# Altium PCB PCB_board.PcbDoc (part 1 of 2)
Units mm, origin at the board's own origin, x right, y up, seen from the top; angles counter-clockwise.
Board outline 103.73 x 65.51 mm, 2 copper layers (Top Layer, Bottom Layer); 75 components, 72 nets, 367 pads, 85 vias.
Unrouted connection lines stored in the file: 3.
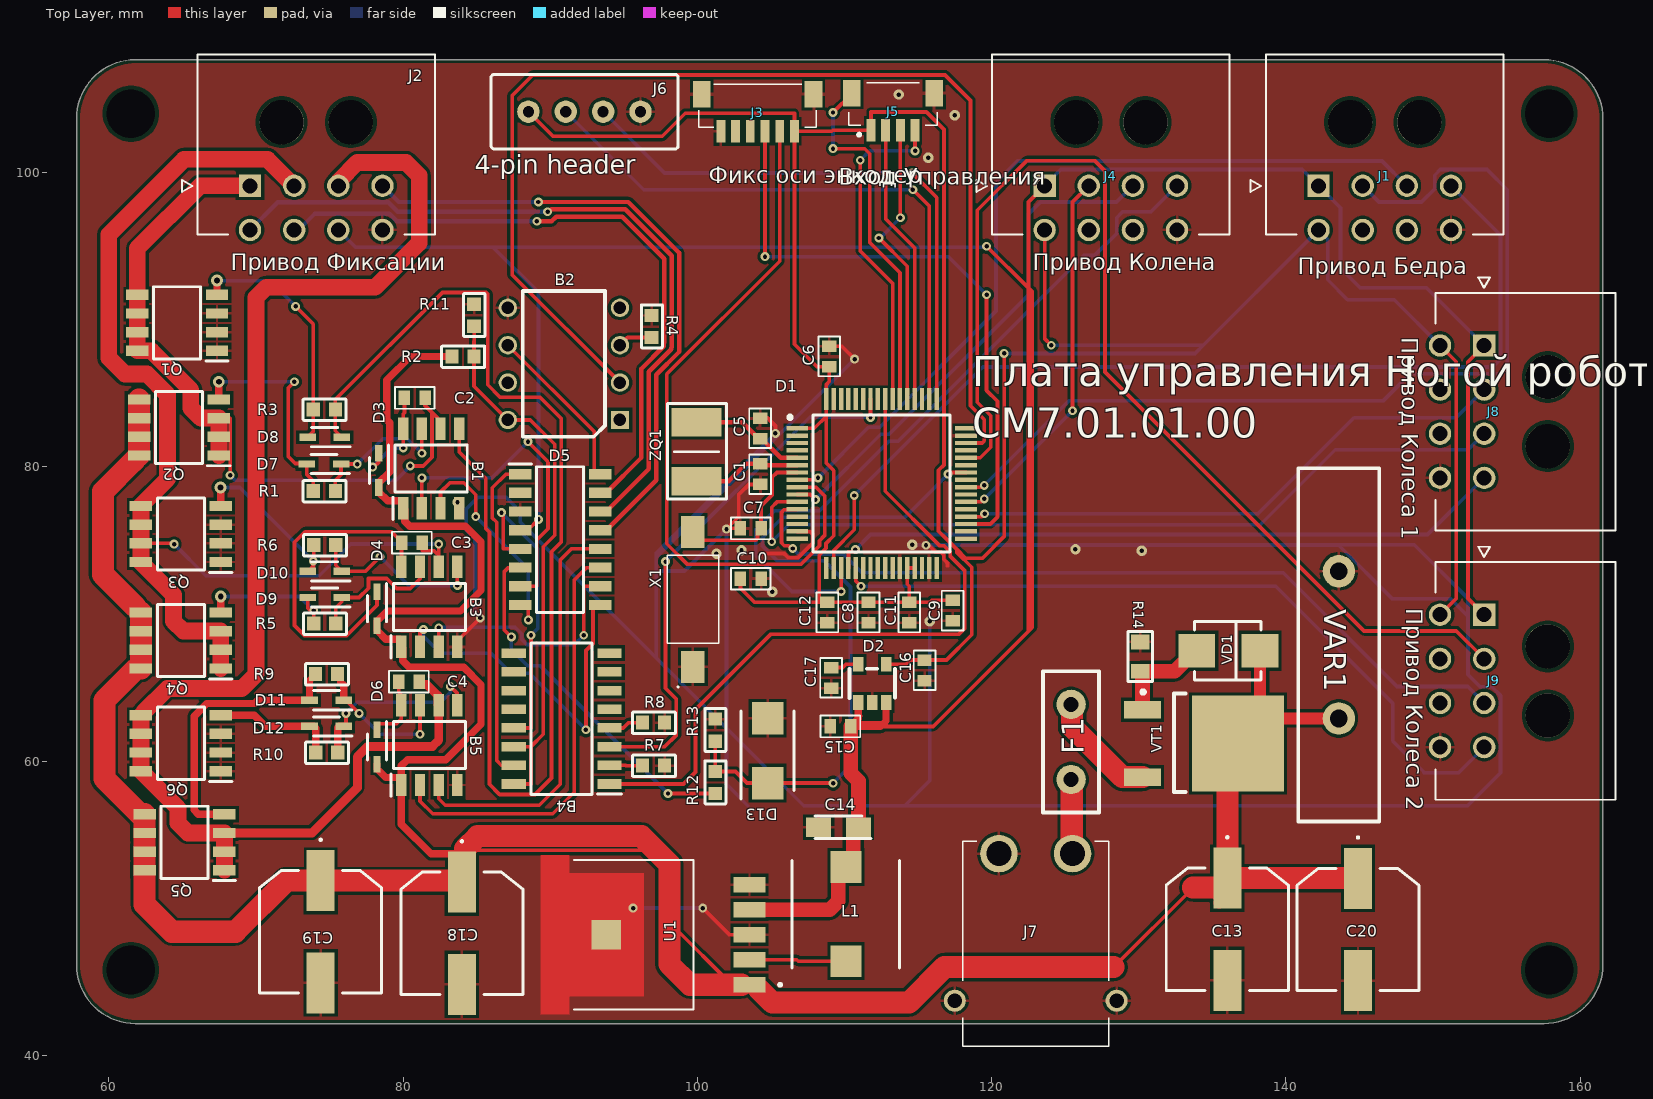
[diagram p0: Top Layer view]
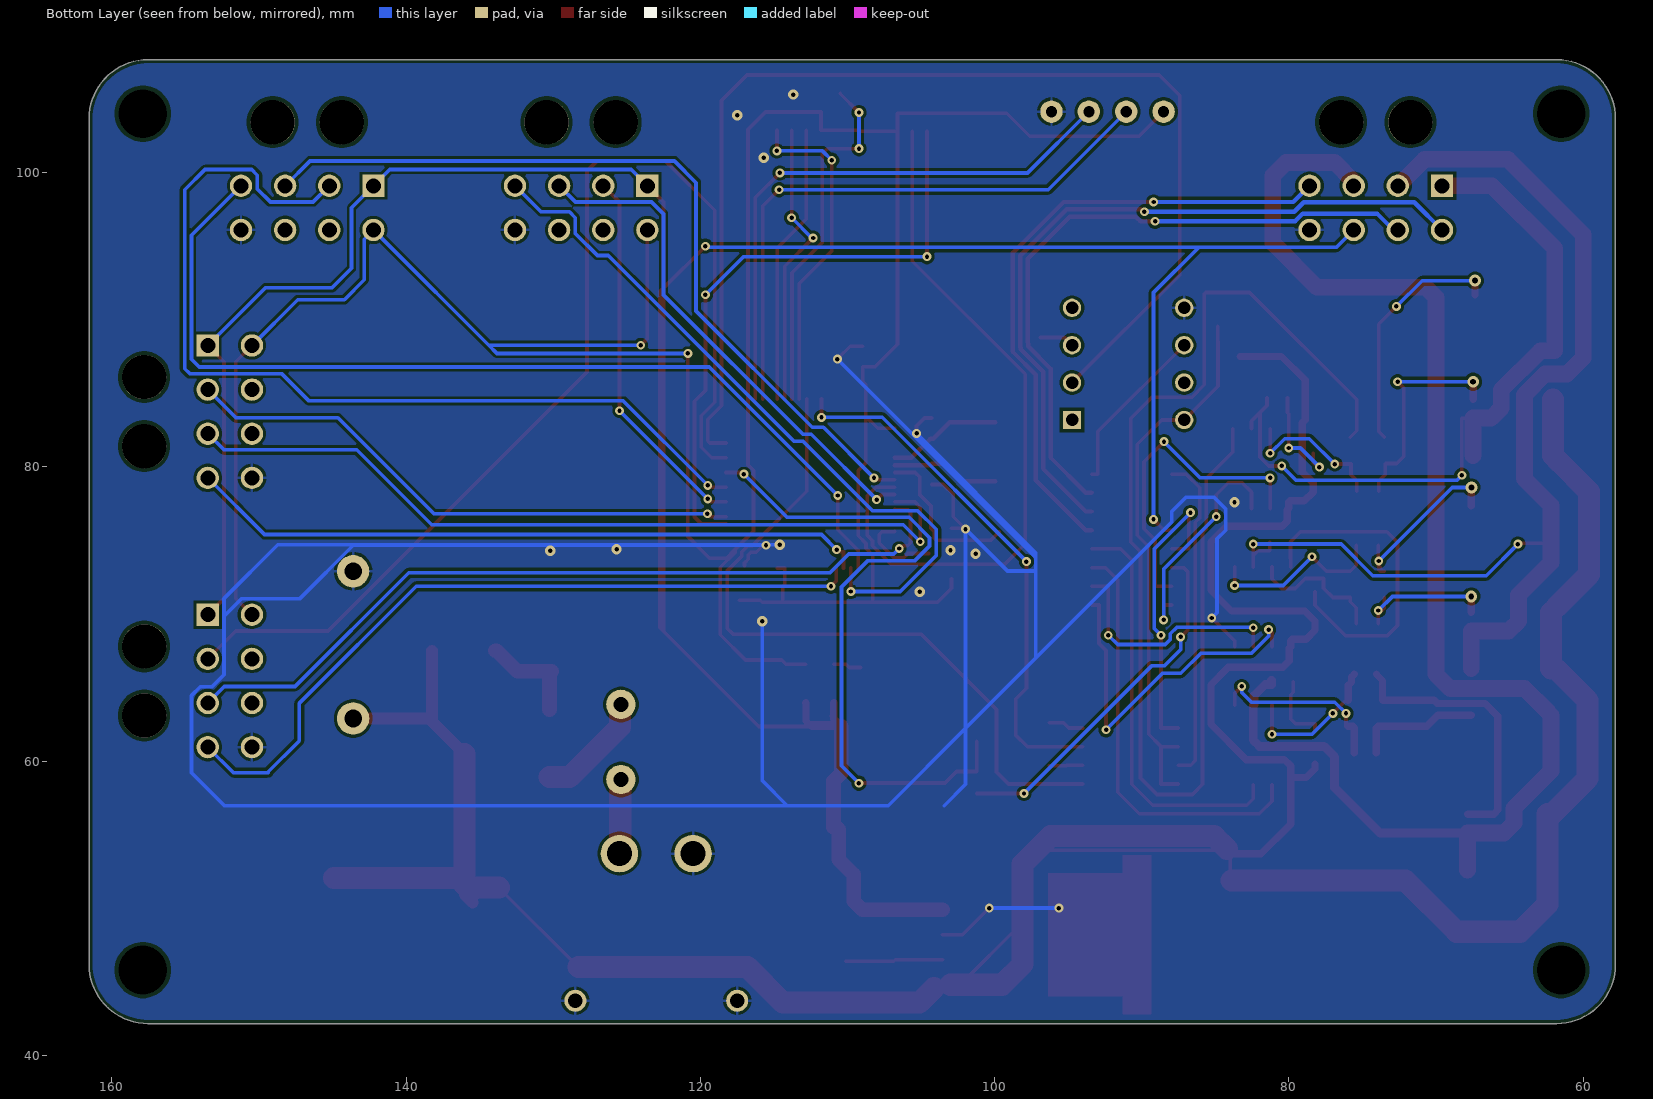
[diagram p1: Bottom Layer view, seen from below]
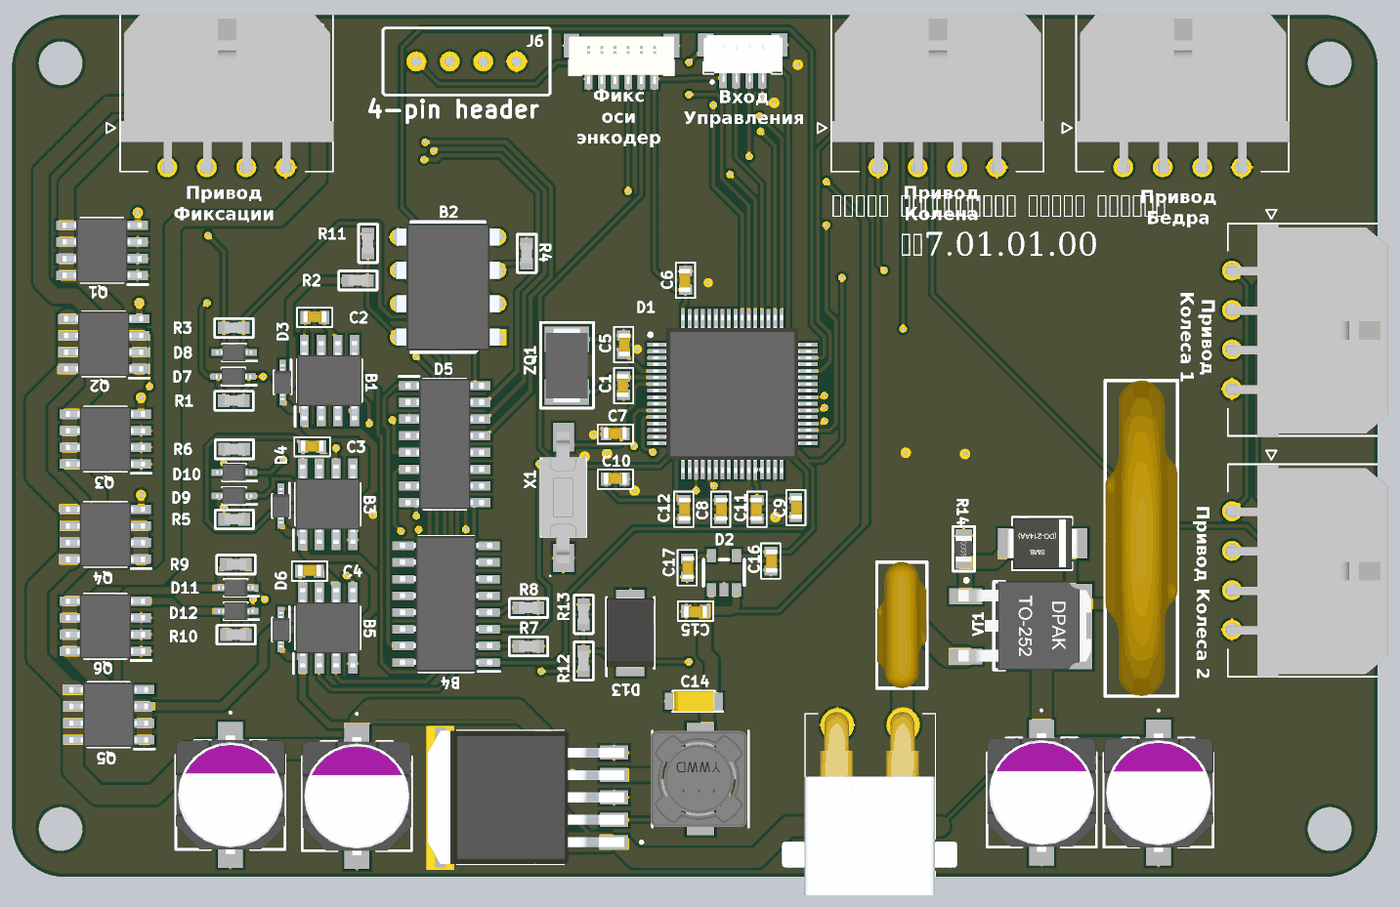
[diagram p2: 3D render of the assembled board from above, using the file's embedded part models]

## Layer stack, top to bottom
Top Solder: solder mask 0.0102, Solder Resist, Dk 3.5
Top Layer: signal copper 0.0356
Dielectric 1: dielectric 0.32, FR-4, Dk 4.8
Bottom Layer: signal copper 0.0356
Bottom Solder: solder mask 0.0102, Solder Resist, Dk 3.5

## Board outline
57.81,46.164 57.81,103.671 cw(c61.81,103.671) 61.81,107.671 157.544,107.671 cw(c157.544,103.671) 161.544,103.671 161.544,46.164 cw(c157.544,46.164) 157.544,42.164 61.81,42.164 cw(c61.81,46.164)

## Design rules (kind name [scope] priority, off if disabled: settings)
AcuteAngle [All] p1: minimum=3.50000000000000E+0001 checktracksonly=FALSE
BoardOutlineClearance "BoardOutlineClearance 1" [All] p1: gap=0.25 ignorepadtopadclearanceinfootprint=FALSE except(0: Arc-SplitContinuation Track-SplitContinuation SMDPad-SplitContinuation THPad-SplitContinuation Via-SplitContinuation Fill-SplitContinuation Poly-SplitContinuation Region-SplitContinuation Text-SplitContinuation) // Milling
BoardOutlineClearance "BoardOutlineClearance 2" [All] p2: gap=0.4 ignorepadtopadclearanceinfootprint=FALSE except(0: Arc-SplitContinuation Track-SplitContinuation SMDPad-SplitContinuation THPad-SplitContinuation Via-SplitContinuation Fill-SplitContinuation Poly-SplitContinuation Region-SplitContinuation Text-SplitContinuation) // V-Cut
Clearance "Clearance-1 1 Oz" [All] p1: gap=0.2 ignorepadtopadclearanceinfootprint=FALSE except(0.25: Arc-Hole Track-Hole SMDPad-Hole THPad-Hole Via-Hole Fill-Hole Poly-Hole Region-Hole Text-Hole) // Standart
Clearance "Clearance 3 Oz" [All] p2: gap=0.35 ignorepadtopadclearanceinfootprint=FALSE except(0.25: Arc-Hole Track-Hole SMDPad-Hole THPad-Hole Via-Hole Fill-Hole Poly-Hole Region-Hole Text-Hole)
Clearance "Clearance 2 Oz" [All] p3: gap=0.3 ignorepadtopadclearanceinfootprint=FALSE except(0.25: Arc-Hole Track-Hole SMDPad-Hole THPad-Hole Via-Hole Fill-Hole Poly-Hole Region-Hole Text-Hole)
Clearance "Clearance-2 1 Oz" [All] p4: gap=0.15 ignorepadtopadclearanceinfootprint=FALSE except(0.2: Arc-Fill Arc-Poly Track-Fill Track-Poly SMDPad-Fill SMDPad-Poly THPad-Fill THPad-Poly Via-Fill Via-Poly Fill-Fill Fill-Poly Poly-Poly; 0.25: Arc-Hole Track-Hole SMDPad-Hole THPad-Hole Via-Hole Fill-Hole Poly-Hole Region-Hole Text-Hole) // Advance
Clearance "Clearance-1 1/2 Oz" [All] p5: gap=0.125 ignorepadtopadclearanceinfootprint=FALSE except(0.2: Arc-Fill Arc-Poly Track-Fill Track-Poly SMDPad-SMDPad SMDPad-Fill SMDPad-Poly THPad-Fill THPad-Poly Via-Fill Via-Poly Fill-Fill Fill-Poly Poly-Poly Poly-Region Poly-Text; 0.25: Arc-Hole Track-Hole SMDPad-Hole THPad-Hole Via-Hole Fill-Hole Poly-Hole Region-Hole Text-Hole) // Standart
Clearance "Clearance-2 1/2 Oz" [All] p6: gap=0.1 ignorepadtopadclearanceinfootprint=FALSE except(0.15: Arc-Fill Arc-Poly Track-Fill Track-Poly SMDPad-SMDPad SMDPad-Fill SMDPad-Poly THPad-Fill THPad-Poly Via-Fill Via-Poly Fill-Fill Fill-Poly Poly-Poly Poly-Region Poly-Text; 0.25: Arc-Hole Track-Hole SMDPad-Hole THPad-Hole Via-Hole Fill-Hole Poly-Hole Region-Hole Text-Hole) // Advance
DiffPairsRouting "DiffPairsRouting 1 Oz" [All] p1: maxlimit=0.254 minlimit=0.2 mostfreqgap=0.254 toplayer_minwidth=0.2 toplayer_maxwidth=0.381 toplayer_prefwidth=0.381 bottomlayer_minwidth=0.2 bottomlayer_maxwidth=0.381 bottomlayer_prefwidth=0.381 maxuncoupledlength=12.7
DiffPairsRouting "DiffPairsRouting 1/2 Oz" [All] p2: maxlimit=0.254 minlimit=0.1 mostfreqgap=0.254 toplayer_minwidth=0.1 toplayer_maxwidth=0.381 toplayer_prefwidth=0.381 bottomlayer_minwidth=0.1 bottomlayer_maxwidth=0.381 bottomlayer_prefwidth=0.381 maxuncoupledlength=12.7
HoleSize "Minimum HoleSize VIA 1" [IsVia] p1: absolutevalues=TRUE maxlimit=5.9 minlimit=0.3 maxpercent=80.000 minpercent=20.000 // Standart
HoleSize "Minimum HoleSize" [IsPad] p2: absolutevalues=TRUE maxlimit=5.9 minlimit=0.6 maxpercent=80.000 minpercent=20.000
HoleSize "Minimum HoleSize VIA 2" [IsVia] p3: absolutevalues=TRUE maxlimit=5.9 minlimit=0.2 maxpercent=80.000 minpercent=20.000 // Advance
HoleToHoleClearance Hole2HoleClearance [All] p1: gap=0.25 allowstackedmicrovias=FALSE
MinimumAnnularRing "Minimum AR VIA Standart" [IsVia] p1: minimumring=0.15
MinimumAnnularRing "Minimum AR PAD Standart" [IsPAD] p2: minimumring=0.2
MinimumAnnularRing "Minimum AR VIA Advance" [IsVia] p3: minimumring=0.1
MinimumAnnularRing "Minimum AR PAD Advance" [IsPAD] p4: minimumring=0.15
MinimumSolderMaskSliver "SolderMask Bridge Standart" [All] p1: minsoldermaskwidth=0.15 // All Masks
MinimumSolderMaskSliver "SolderMask Bridge Advance" [All] p2: minsoldermaskwidth=0.1 // Mask LDI
PlaneClearance "PlaneClearance 1 Oz" [All] p1: clearance=0.2
PlaneClearance "PlaneClearance 3 Oz" [All] p2: clearance=0.35
PlaneClearance "PlaneClearance 2 Oz" [All] p3: clearance=0.3
PlaneClearance "PlaneClearance-1 1/2 Oz" [All] p4: clearance=0.2 // Standart
PlaneClearance "PlaneClearance-2 1/2 Oz" [All] p5: clearance=0.15 // Advance
PlaneConnect "TermalConnect-1 1 Oz" [All] p1: planeconnectstyle=Relief reliefexpansion=0.2 reliefentries=4 reliefconductorwidth=0.2 reliefairgap=0.2 // Standart
PlaneConnect "TermalConnect 3 Oz" [All] p2: planeconnectstyle=Relief reliefexpansion=0.2 reliefentries=4 reliefconductorwidth=0.35 reliefairgap=0.35 // Standart
PlaneConnect "TermalConnect 2 Oz" [All] p3: planeconnectstyle=Relief reliefexpansion=0.2 reliefentries=4 reliefconductorwidth=0.3 reliefairgap=0.3 // Standart
PlaneConnect "TermalConnect-2 1 Oz" [All] p4: pad.planeconnectstyle=Relief pad.reliefexpansion=0.15 pad.reliefentries=4 pad.reliefconductorwidth=0.2 pad.reliefairgap=0.2 via.planeconnectstyle=Direct via.reliefexpansion=0.15 via.reliefentries=4 via.reliefconductorwidth=0.15 via.reliefairgap=0.15 // Advance
PlaneConnect "TermalConnect-1 1/2 Oz" [All] p5: planeconnectstyle=Relief reliefexpansion=0.2 reliefentries=4 reliefconductorwidth=0.2 reliefairgap=0.2 // Standart
PlaneConnect "TermalConnect-2 1/2 Oz" [All] p6: pad.planeconnectstyle=Relief pad.reliefexpansion=0.15 pad.reliefentries=4 pad.reliefconductorwidth=0.15 pad.reliefairgap=0.15 via.planeconnectstyle=Direct via.reliefexpansion=0.15 via.reliefentries=4 via.reliefconductorwidth=0.15 via.reliefairgap=0.15 // Advance
PolygonConnect "PolygonConnect-1 1 Oz" [All] p1: thpad.connectstyle=Relief thpad.reliefconductorwidth=0.2 thpad.reliefentries=4 thpad.polygonreliefangle="90 Angle" thpad.airgapwidth=0.2 smdpad.connectstyle=Relief smdpad.reliefconductorwidth=0.2 smdpad.reliefentries=4 smdpad.polygonreliefangle="90 Angle" smdpad.airgapwidth=0.2 via.connectstyle=Direct via.reliefconductorwidth=0.254 via.reliefentries=4 via.polygonreliefangle="90 Angle" via.airgapwidth=0.254 // Standart
PolygonConnect "PolygonConnect 3 Oz" [All] p2: thpad.connectstyle=Relief thpad.reliefconductorwidth=0.35 thpad.reliefentries=4 thpad.polygonreliefangle="90 Angle" thpad.airgapwidth=0.35 smdpad.connectstyle=Relief smdpad.reliefconductorwidth=0.35 smdpad.reliefentries=4 smdpad.polygonreliefangle="90 Angle" smdpad.airgapwidth=0.35 via.connectstyle=Direct via.reliefconductorwidth=0.254 via.reliefentries=4 via.polygonreliefangle="90 Angle" via.airgapwidth=0.254
PolygonConnect "PolygonConnect 2 Oz" [All] p3: thpad.connectstyle=Relief thpad.reliefconductorwidth=0.3 thpad.reliefentries=4 thpad.polygonreliefangle="90 Angle" thpad.airgapwidth=0.3 smdpad.connectstyle=Relief smdpad.reliefconductorwidth=0.3 smdpad.reliefentries=4 smdpad.polygonreliefangle="90 Angle" smdpad.airgapwidth=0.3 via.connectstyle=Direct via.reliefconductorwidth=0.254 via.reliefentries=4 via.polygonreliefangle="90 Angle" via.airgapwidth=0.254
PolygonConnect "PolygonConnect-2 1 Oz" [All] p4: thpad.connectstyle=Relief thpad.reliefconductorwidth=0.15 thpad.reliefentries=4 thpad.polygonreliefangle="90 Angle" thpad.airgapwidth=0.15 smdpad.connectstyle=Relief smdpad.reliefconductorwidth=0.15 smdpad.reliefentries=4 smdpad.polygonreliefangle="90 Angle" smdpad.airgapwidth=0.15 via.connectstyle=Direct via.reliefconductorwidth=0.254 via.reliefentries=4 via.polygonreliefangle="90 Angle" via.airgapwidth=0.254 // Advance
PolygonConnect "PolygonConnect-1 1/2 Oz" [All] p5: thpad.connectstyle=Relief thpad.reliefconductorwidth=0.15 thpad.reliefentries=4 thpad.polygonreliefangle="90 Angle" thpad.airgapwidth=0.2 smdpad.connectstyle=Relief smdpad.reliefconductorwidth=0.2 smdpad.reliefentries=4 smdpad.polygonreliefangle="90 Angle" smdpad.airgapwidth=0.2 via.connectstyle=Direct via.reliefconductorwidth=0.254 via.reliefentries=4 via.polygonreliefangle="90 Angle" via.airgapwidth=0.254 // Standart
PolygonConnect "PolygonConnect-2 1/2 Oz" [All] p6: thpad.connectstyle=Relief thpad.reliefconductorwidth=0.125 thpad.reliefentries=4 thpad.polygonreliefangle="90 Angle" thpad.airgapwidth=0.15 smdpad.connectstyle=Relief smdpad.reliefconductorwidth=0.125 smdpad.reliefentries=4 smdpad.polygonreliefangle="90 Angle" smdpad.airgapwidth=0.15 via.connectstyle=Direct via.reliefconductorwidth=0.254 via.reliefentries=4 via.polygonreliefangle="90 Angle" via.airgapwidth=0.254 // Advance
RoutingCorners [All] p1 off: cornerstyle=45-Degree minsetback=2.54 maxsetback=2.54
RoutingVias [All] p1: holewidth=0.3 width=0.6 viastyle="Through Hole" minholewidth=0.2 minwidth=0.4 maxholewidth=5.9 maxwidth=6.4
SilkToSilkClearance Silk2SilkClearance [All] p1 off: silktosilkclearance=0.15
SilkToSolderMaskClearance Silk2SolderMaskClearance [IsPad] p1 off: minsilkscreentomaskgap=0.15 clearancetoexposedcopper=TRUE
SolderMaskExpansion SolderMaskExpansion-1 [All] p1: expansion=0.05 istentingtop=FALSE // Standart
SolderMaskExpansion "SolderMaskExpansion LDI" [All] p2: expansion=0.025 istentingtop=FALSE // Advance
SupplyNets "Schematic Supply Nets_4" [InNet('+5V')] p1: voltage=0.000
SupplyNets "Schematic Supply Nets_3" [InNet('GND')] p2: voltage=0.000
SupplyNets "Schematic Supply Nets_2" [InNet('+12V')] p3: voltage=0.000
SupplyNets "Schematic Supply Nets_1" [InNet('+12V_IN')] p4: voltage=0.000
SupplyNets "Schematic Supply Nets" [InNet('+3.3V')] p5: voltage=0.000
UnRoutedNet [All] p1: checkbadconnections=TRUE
Width "Width 1 Oz" [All] p1: maxlimit=10 minlimit=0.15 preferedwidth=0.25 minimp=50.000000 maximp=50.000000 favimp=50.000000 checkconnectedcopper=TRUE
Width "Width 3 Oz" [All] p2: maxlimit=10 minlimit=0.35 preferedwidth=0.4 checkconnectedcopper=TRUE
Width "Width 2 Oz" [All] p3: maxlimit=10 minlimit=0.3 preferedwidth=0.35 minimp=50.000000 maximp=50.000000 favimp=50.000000 checkconnectedcopper=TRUE
Width "Width 1/2 Oz" [All] p4: maxlimit=10 minlimit=0.1 preferedwidth=0.125 checkconnectedcopper=TRUE
20 further rules are at their usual default settings.

## Classes and differential pairs
component class A1: B1 B2 B3 B4 B5 C2 C3 C4 D3 D4 D5 D6 D7 D8 D9 D10 D11 D12 D13 Q1 Q2 Q3 Q4 Q5 Q6 R1 R2 R3 R4 R5 R6 R7 R8 R9 R10 R11 R12 R13
component class Схема_принципиальная_общая: C1 C5 C6 C7 C8 C9 C10 C11 C12 C13 C14 C15 C16 C17 C18 C19 C20 D1 D2 F1 J1 J2 J3 J4 J5 J6 J7 J8 J9 L1 R14 U1 VAR1 VD1 VT1 X1 ZQ1

## Components (designator, comment, footprint, x,y, rotation, side; value= is the part's Value field where it differs from the comment)
B1 "IR2101S" SOIC127P600X175-8N 81.915,79.883 r90 top
B2 "HCPL-4504-000E" DIP762W65P254L965H470Q8N 90.932,86.995 r180 top
B3 "IR2101S" SOIC127P600X175-8N 81.788,70.485 r90 top
B4 "TLP291-4_GB_E_T" SOIC127P700X220-16N 90.781,62.89 r180 top
B5 "IR2101S" SOIC127P600X175-8N 81.788,61.087 r90 top
C1 "12пФ" CAPC1608X87N 104.267,79.502 r270 top
C2 "105пФ" CAPC1608X87N 80.797,84.684 r180 top
C3 "105пФ" CAPC1608X87N 80.605,74.854 r180 top
C4 "105пФ" CAPC1608X87N 80.4,65.4 r180 top
C5 "12пФ" CAPC1608X87N 104.267,82.615 r90 top
C6 "100нФ" CAPC1608X87N 108.966,87.503 r270 top
C7 "0.1мкФ" CAPC1608X87N 103.632,75.819 r180 top
C8 "100нФ" CAPC1608X87N 111.633,70.104 r90 top
C9 "100нФ" CAPC1608X87N 117.348,70.231 r90 top
C10 "100нФ" CAPC1608X87N 103.632,72.39 r180 top
C11 "10нФ" CAPC1608X87N 114.402,70.104 r270 top
C12 "100нФ" CAPC1608X87N 108.839,70.104 r90 top
C13 "270мкФ" 16SVF270M 136.019,48.57 r270 top
C14 "220мкФ" CAPPM3216X180N 109.6,55.5 r180 top
C15 "1мкФ" CAPC1608X87N 109.728,62.357 r0 top
C16 "1мкФ" CAPC1608X87N 115.443,66.167 r90 top
C17 "22нФ" CAPC1608X87N 109.093,65.659 r90 top
C18 "270мкФ" 16SVF270M 84,48.3 r270 top
C19 "270мкФ" 16SVF270M 74.4,48.4 r270 top
C20 "270мкФ" 16SVF270M 144.902,48.559 r270 top
D1 "" QFP50P1200X1200X160-64N 112.522,78.867 r0 top
D2 "" RT9193 111.887,65.278 r0 top
D3 "IN4148WS" SOD2713X115N 78.359,79.756 r270 top
D4 "IN4148WS" SOD2713X115N 78.232,70.358 r270 top
D5 "JY01-SOP16" SOIC127P600X175-16N 90.678,75.057 r0 top
D6 "IN4148WS" SOD2713X115N 78.232,60.96 r270 top
D7 "IN4148WS" SOD2713X115N 74.625,80.188 r180 top
D8 "IN4148WS" SOD2713X115N 74.676,82.017 r180 top
D9 "IN4148WS" SOD2713X115N 74.676,71.12 r180 top
D10 "IN4148WS" SOD2713X115N 74.676,72.898 r180 top
D11 "IN4148WS" SOD2713X115N 74.803,64.135 r180 top
D12 "IN4148WS" SOD2713X115N 74.803,62.357 r180 top
D13 "SMBJ3V3-E3_52" DIOM5436X244N 104.775,60.706 r90 top
F1 "Fuze_LB250LVF" Fuze_LB250LVF 125.4,61.3 r90 top
J1 "430450800" MOLEX_430450800 142.223,99.1 r180 top
J2 "430450800" MOLEX_430450800 69.6,99.1 r180 top
J3 "BM06B-SRSS-TB_LF__SN_" BM06BSRSSTBLFSN 104.1,104.4 r180 top
J4 "430450800" MOLEX_430450800 123.604,99.1 r180 top
J5 "BM04B-SRSS-TB_LFSN_" BM04BSRSSTBLFSN 113.3,104.2 r0 top
J6 "4-pin header" "4-pin header" 93.599,104.14 r0 top
J7 "XT30PW-M" XT30PWM 123,47.8 r180 top
J8 "430450800" MOLEX_430450800 153.48,88.25 r90 top
J9 "430450800" MOLEX_430450800 153.48,69.95 r90 top
L1 "33мкГн" INDPM7373X450N 110.1,49.6 r90 top
Q1 "IRF8736PBF" SOIC127P600X175-8N 64.643,89.789 r180 top
Q2 "IRF8736PBF" SOIC127P600X175-8N 64.77,82.677 r180 top
Q3 "IRF8736PBF" SOIC127P600X175-8N 64.897,75.438 r180 top
Q4 "IRF8736PBF" SOIC127P600X175-8N 64.897,68.199 r180 top
Q5 "IRF8736PBF" SOIC127P600X175-8N 65.151,54.483 r180 top
Q6 "IRF8736PBF" SOIC127P600X175-8N 64.897,61.214 r180 top
R1 "51" RESC1608X55N 74.651,78.359 r180 top
R2 "51кОм" RESC1608X55N 84.074,87.503 r180 top
R3 "51" RESC1608X55N 74.651,83.896 r180 top
R4 "130" RESC1608X55N 96.901,89.535 r270 top
R5 "51" RESC1608X55N 74.676,69.342 r180 top
R6 "51" RESC1608X55N 74.676,74.676 r180 top
R7 "66" RESC1608X55N 97.028,59.69 r180 top
R8 "66" RESC1608X55N 97.028,62.611 r180 top
R9 "51" RESC1608X55N 74.803,65.913 r180 top
R10 "51" RESC1608X55N 74.815,60.579 r180 top
R11 "36кОм" RESC1608X55N 84.836,90.297 r270 top
R12 "10кОм" RESC1608X55N 101.219,58.547 r270 top
R13 "5.1кОм" RESC1608X55N 101.219,62.103 r270 top
R14 "Resistor 0805 100 Ohm" "RES: 0805" 130.1,67.1 r270 top value=100
U1 "LM2575HVSX-5.0_NOPB" VREG_LM2575HVSX-5.0_NOPB 97,48.2 r180 top
VAR1 "FPV160808G120PLT" Varistor_20K391 143.6,67.9 r270 top
VD1 "Zener diode, 5.1V, 500mW, 0.9V, 17Ohm, SOD-123, -55...+150°C" "DIODE: SMB" 136.1,67.5 r0 top
VT1 "MOSFET P-channel transistor, 20V, 2.6A, 2.9nC, 2.5W, 135mOhm, 220pF, SOT-23, -55...+150°C" DPAK 133.5,61.2 r0 top
X1 "1437566-3" 14375663 99.695,70.993 r90 top
ZQ1 "NX5032GA-12.000M-LN-CD-1" INDC5032X150N 99.949,81.026 r90 top

## Footprints (in the part's own frame and the unit in brackets; to place one, negate y for a bottom-side part, rotate by r counter-clockwise, add the part's x,y. Pads: shape width x height; smd on the part's side, far side on the other; paste and mask are expansions set on the pad)
"4-pin header" [mil]
  round 60 hole 30: 1(-200,0) 2(-100,0) 3(0,0) 4(100,0)
  silkscreen extent -300,-100 200,100
16SVF270M [mm]
  rect 4.15x1.9 smd: 1(-3.475,0) 2(3.475,0)
  silkscreen extent -6.3,-4.15 4.15,4.15, body extent -4.5,-4.15 4.5,4.15, height 6.9
14375663 [mm]
  rect 2.18x1.6 smd: 1(-4.59,0) 2(4.59,0)
  silkscreen extent -6,-1.75 3,1.75, body extent -4.98,-1.72 4.98,1.78, height 4.32
BM04BSRSSTBLFSN [mm]
  rect 0.6x1.55 smd: 1(-1.5,-1.325) 2(-0.5,-1.325) 3(0.5,-1.325) 4(1.5,-1.325)
  rect 1.2x1.8 smd: MP1(-2.8,1.2) MP2(2.8,1.2)
  silkscreen extent -3,-1.72 3,1.9, body extent -2.95,-1.65 3.05,1.95, height 4.41
BM06BSRSSTBLFSN [mm]
  rect 0.6x1.55 smd: 1(-2.5,1.588) 2(-1.5,1.588) 3(-0.5,1.588) 4(0.5,1.588) 5(1.5,1.588) 6(2.5,1.588)
  rect 1.2x1.8 smd: 7(-3.8,-0.937) 8(3.8,-0.937)
  silkscreen extent -4,-1.59 4,1.31, body extent -4.01,-1.62 3.99,1.98, height 4.3
CAPC1608X87N [mm]
  rect 0.78x0.98 smd: 1(-0.7,0) 2(0.7,0)
  silkscreen extent -1.35,-0.74 1.35,0.74, body extent -0.87,-0.49 0.87,0.38, height 0.97
CAPPM3216X180N [mm]
  rect 1.7x1.3 smd: 1(-1.35,0) 2(1.35,0)
  silkscreen extent -2.2,-0.78 1.6,0.77, body extent -1.6,-0.79 1.6,0.76, height 1.8
"DIODE: SMB" [mm]
  rect 2.5x2.3 smd: 1(-2.15,0) 2(2.15,0)
  silkscreen extent -2.3,-2 2.2,2, body extent -2.75,-1.95 2.75,1.95, height 2.45
DIOM5436X244N [mm]
  rect 2.2x2.15 smd: 1(-2.2,0) 2(2.2,0)
  silkscreen extent -3.27,-1.81 2.7,1.81, body extent -2.7,-1.81 2.7,1.81, height 2.44
DIP762W65P254L965H470Q8N [mm]
  rect 1.25x1.25 / inner round 1.25 / far side rect 1.25x1.25 hole 0.85: 1(-3.81,3.81)
  round 1.25 hole 0.85: 2(-3.81,1.27) 3(-3.81,-1.27) 4(-3.81,-3.81) 5(3.81,-3.81) 6(3.81,-1.27) 7(3.81,1.27) 8(3.81,3.81)
  silkscreen extent -2.79,-4.95 2.79,4.95, body extent -3.97,-4.82 3.97,4.82, height 4.7
DPAK [mm]
  rect 2.5x1.2 smd: 1(-3.25,2.29) 3(-3.25,-2.29)
  rect 6.25x6.5 smd: 2(3.25,0)
  round 0.5 on Mech1: ""(-3.2,2.9)
  silkscreen extent -3.32,-3.3 -0.3,3.62, body extent -3.8,-3.32 6.3,3.42, height 2.37
Fuze_LB250LVF [mm]
  round 2 hole 1: 1(-2.55,0) 2(2.55,0)
  silkscreen extent -4.8,-1.9 4.8,1.9, body extent -4.8,-1.9 4.8,1.9, height 19.69
INDC5032X150N [mm]
  rect 1.95x3.4 smd: 1(-2,0) 2(2,0)
  silkscreen extent -3.23,-2.03 3.28,1.98, body extent -2.8,-1.6 2.8,1.6, height 1.6
INDPM7373X450N [mm]
  rect 2.15x2.1 smd: 1(-3.2,0) 2(3.2,0)
  silkscreen extent -3.65,-3.65 3.65,3.65, body extent -3.65,-3.52 3.65,3.78, height 4.14
MOLEX_430450800 [mm]
  rect 1.52x1.52 / inner round 1.52 / far side rect 1.52x1.52 hole 1.02 mask+0.076: 1(0,0)
  round 1.52 hole 1.02 mask+0.076: 2(-3,0) 3(-6,0) 4(-9,0) 5(0,3) 6(-3,3) 7(-6,3) 8(-9,3)
  round 3 hole 3 unplated mask+0.076: ""(-6.85,-4.32) ""(-2.15,-4.32)
  silkscreen extent -12.58,-8.92 4.62,3.32, body extent -12.62,-8.84 3.53,3.4, height 8.92
QFP50P1200X1200X160-64N [mm]
  rect 1.475x0.3 smd: 1(-5.738,3.75) 2(-5.738,3.25) 3(-5.738,2.75) 4(-5.738,2.25) 5(-5.738,1.75) 6(-5.738,1.25) 7(-5.738,0.75) 8(-5.738,0.25) 9(-5.738,-0.25) 10(-5.738,-0.75) 11(-5.738,-1.25) 12(-5.738,-1.75) 13(-5.738,-2.25) 14(-5.738,-2.75) 15(-5.738,-3.25) 16(-5.738,-3.75) 33(5.738,-3.75) 34(5.738,-3.25) 35(5.738,-2.75) 36(5.738,-2.25) 37(5.738,-1.75) 38(5.738,-1.25) 39(5.738,-0.75) 40(5.738,-0.25) 41(5.738,0.25) 42(5.738,0.75) 43(5.738,1.25) 44(5.738,1.75) 45(5.738,2.25) 46(5.738,2.75) 47(5.738,3.25) 48(5.738,3.75)
  rect 0.3x1.475 smd: 17(-3.75,-5.738) 18(-3.25,-5.738) 19(-2.75,-5.738) 20(-2.25,-5.738) 21(-1.75,-5.738) 22(-1.25,-5.738) 23(-0.75,-5.738) 24(-0.25,-5.738) 25(0.25,-5.738) 26(0.75,-5.738) 27(1.25,-5.738) 28(1.75,-5.738) 29(2.25,-5.738) 30(2.75,-5.738) 31(3.25,-5.738) 32(3.75,-5.738) 49(3.75,5.738) 50(3.25,5.738) 51(2.75,5.738) 52(2.25,5.738) 53(1.75,5.738) 54(1.25,5.738) 55(0.75,5.738) 56(0.25,5.738) 57(-0.25,5.738) 58(-0.75,5.738) 59(-1.25,5.738) 60(-1.75,5.738) 61(-2.25,5.738) 62(-2.75,5.738) 63(-3.25,5.738) 64(-3.75,5.738)
  silkscreen extent -6.35,-4.65 4.65,4.65, body extent -6,-6 6,6, height 1.6
"RES: 0805" [mm]
  rect 1x1.25 smd: 1(-1,0) 2(1,0)
  silkscreen extent -1.7,-0.83 1.7,0.83, body extent -1,-0.6 1,0.6, height 0.44
RESC1608X55N [mm]
  rect 0.9x0.95 smd: 1(-0.75,0) 2(0.75,0)
  silkscreen extent -1.47,-0.71 1.45,0.74, body extent -0.8,-0.4 0.75,0.4, height 0.45
RT9193 [mm]
  rect 0.7x1 smd: 1(-0.95,-1.3) 2(0,-1.3) 3(0.95,-1.3) 4(0.95,1.3) 5(-0.95,1.3)
  silkscreen extent -1.55,-1 1.55,1
SOD2713X115N [mm]
  rect 1.125x0.5 smd: 1(-1.162,0) 2(1.162,0)
  silkscreen extent -1.73,-0.65 0.89,0.65, body extent -1.34,-0.65 1.34,0.65, height 1.15
SOIC127P600X175-8N [mm]
  rect 1.525x0.7 smd: 1(-2.712,1.905) 2(-2.712,0.635) 3(-2.712,-0.635) 4(-2.712,-1.905) 5(2.712,-1.905) 6(2.712,-0.635) 7(2.712,0.635) 8(2.712,1.905)
  silkscreen extent -3.47,-2.45 1.6,2.61, body extent -3,-2.45 3,2.45, height 1.75
SOIC127P600X175-16N [mm]
  rect 1.525x0.7 smd: 1(-2.712,4.445) 2(-2.712,3.175) 3(-2.712,1.905) 4(-2.712,0.635) 5(-2.712,-0.635) 6(-2.712,-1.905) 7(-2.712,-3.175) 8(-2.712,-4.445) 9(2.712,-4.445) 10(2.712,-3.175) 11(2.712,-1.905) 12(2.712,-0.635) 13(2.712,0.635) 14(2.712,1.905) 15(2.712,3.175) 16(2.712,4.445)
  silkscreen extent -3.47,-4.95 1.6,5.15, body extent -3,-4.95 3,4.95, height 1.75
SOIC127P700X220-16N [mm]
  rect 1.65x0.65 smd: 1(-3.25,4.445) 2(-3.25,3.175) 3(-3.25,1.905) 4(-3.25,0.635) 5(-3.25,-0.635) 6(-3.25,-1.905) 7(-3.25,-3.175) 8(-3.25,-4.445) 9(3.25,-4.445) 10(3.25,-3.175) 11(3.25,-1.905) 12(3.25,-0.635) 13(3.25,0.635) 14(3.25,1.905) 15(3.25,3.175) 16(3.25,4.445)
  silkscreen extent -4.07,-5.15 2.08,5.15, body extent -3.5,-5.17 3.5,5.13, height 2.2
Varistor_20K391 [mm]
  round 2.2 hole 1.2: 1(-5,0) 2(5,0)
  silkscreen extent -12,-2.75 12,2.75, body extent -11.99,-2.75 11.99,2.75, height 28.49
VREG_LM2575HVSX-5.0_NOPB [mm]
  rect 2.16x1.07 smd: 1(-6.545,3.4) 2(-6.545,1.7) 3(-6.545,0) 4(-6.545,-1.7) 5(-6.545,-3.4)
  rect 2x2 smd paste-2 mask+0: 6(3.175,0)
  Top Layer region: 7.625,-5.4 5.715,-5.4 5.715,-4.165 0.635,-4.165 0.635,4.165 5.715,4.165 5.715,5.4 7.625,5.4
  silkscreen extent -8.72,-5.08 5.4,5.08, body extent -7.3,-5.08 7.61,5.08, height 4.83
XT30PWM [mm]
  round 2.55 hole 1.7: 1(-2.5,-5.912) 2(2.5,-5.912)
  round 1.5 hole 1: 3(5.5,4.088) 4(-5.5,4.088)
  silkscreen extent -4.95,-6.76 4.95,7.19, body extent -6.6,-6.91 6.7,7.04, height 5.22

## Part data
B1 B3 B5: "IC GATE DRVR HALF-BRIDGE 8SOIC", Manufacturer_Name=Infineon, Datasheet Link=https://pdf1.alldatasheet.com/datasheet-pdf/view/102221/IRF/IR2101S.html, Geometry.Height=1.75mm, Manufacturer_Part_Number=IR2101S
B2: "Optocoupler, Transistor Output, 1 Channel, DIP, 8 Pins, 25 mA, 3.75 kV, 25 %", Manufacturer_Name="Avago Technologies", Mouser Part Number=630-HCPL-4504-000E, Datasheet Link=https://componentsearchengine.com/Datasheets/2/HCPL-4504-000E.pdf, Geometry.Height=4.7mm, Manufacturer_Part_Number=HCPL-4504-000E, Mouser Price/Stock=https://www.mouser.co.uk/ProductDetail/Broadcom-Avago/HCPL-4504-000E?qs=s%252BgfxR24RQ6uFOvNhu%252ByDw%3D%3D
B4: "Photocoupler, Tr, 2.3mm, DC, SO16", Arrow Part Number=TLP291-4(GB,E(T, Manufacturer_Name=Toshiba, Arrow Price/Stock=https://www.arrow.com/en/products/tlp291-4-gbe-t/toshiba?region=europe, Datasheet Link=http://toshiba.semicon-storage.com/info/docget.jsp?did=12858&prodName=TLP291-4, Geometry.Height=2.2mm, Manufacturer_Part_Number=TLP291-4(GB,E(T
C1 C2 C3 C4 C5 C6 C7 C8 C9 C10 C11 C12 C15 C16 C17: library part C0603, "C 0603", Manufacturer_Name=KEMET, Manufacturer_Part_Number=C0603C222K4REC7411, Datasheet Link=https://www.kemet.com/specsheet/C0603C222K4REC7411, Geometry.Height=0.87mm
C13 C18 C19 C20: library part 25SVPF100M, "Capacitor Polarised", Manufacturer_Name=Panasonic, Mouser Part Number=667-25SVPF100M, Arrow Part Number=25SVPF100M, Arrow Price/Stock=https://www.arrow.com/en/products/25svpf100m/panasonic?region=nac, Datasheet Link=http://industrial.panasonic.com/cdbs/www-data/pdf/AAB8000/AAB8000C177.pdf, Height=7mm, Manufacturer_Part_Number=25SVPF100M, Mouser Price/Stock=https://www.mouser.co.uk/ProductDetail/Panasonic/25SVPF100M?qs=OE1iw1LrrPHrTLW3S9d9vQ%3D%3D
C14: library part TAJA104K050R, "Capacitor tantalum TAJ 1206 100nF 50V AVX 100nF SMD Solid MnO2 Tantalum Electrolytic Capacitor, 50 V dc +/-10%, TAJ Series", Manufacturer_Name="Kyocera AVX", Mouser Part Number=N/A, Datasheet Link=http://www.farnell.com/datasheets/1680476.pdf, Geometry.Height=1.8mm, Manufacturer_Part_Number=TAJA104K050R, Mouser Price/Stock=http://www.mouser.com/Search/ProductDetail.aspx?qs=TDs2sH6HKGut6%252bATQXwpTg%3d%3d
D1: library part STM32G474RBT6, "LQFP is a 64 pins, 10 x 10 mm low-profile quad flat package.", Manufacturer_Name=STMicroelectronics, Mouser Part Number=511-STM32G474RBT6, Arrow Part Number=STM32G474RBT6, Arrow Price/Stock=https://www.arrow.com/en/products/stm32g474rbt6/stmicroelectronics?region=nac, Datasheet Link=https://www.mouser.com/datasheet/2/389/stm32g474cb-1600828.pdf, Geometry.Height=1.6mm, Manufacturer_Part_Number=STM32G474RBT6, Mouser Price/Stock=https://www.mouser.co.uk/ProductDetail/STMicroelectronics/STM32G474RBT6?qs=uwxL4vQweFP0uAZUZXLBhQ%3D%3D
D2: library part RT9193
D3 D4 D6 D7 D8 D9 D10 D11 D12: "Small Signal Fast Switching Diode", Manufacturer_Name=Vishay, Datasheet Link=https://docs.rs-online.com/69cb/0900766b80dd2a8d.pdf, Geometry.Height=1.15mm, Manufacturer_Part_Number=IN4148WS
D5: "BLDC FOC Controller", Manufacturer_Name=China, Datasheet Link=http://www.lenzetech.com/public/store/pdf/jsggs/AC6969A%C2%A0Datasheet%C2%A0V1.0.pdf, Geometry.Height=1.75mm, Manufacturer_Part_Number=JY01-SOP16
D13: "TVS Diode (Uni-directional)", Arrow Part Number=SMBJ3V3-E3/52, Manufacturer_Name=Vishay, Mouser Part Number=625-SMBJ3V3-E3, Arrow Price/Stock=https://www.arrow.com/en/products/smbj3v3-e352/vishay?region=nac, Datasheet Link=http://www.farnell.com/datasheets/2244846.pdf, Height=2.44mm, Manufacturer_Part_Number=SMBJ3V3-E3/52, Mouser Price/Stock=https://www.mouser.co.uk/ProductDetail/Vishay-General-Semiconductor/SMBJ3V3-E3-52?qs=%252BKsK5HlK7GG3a%2FL90gCz%2Fg%3D%3D
F1: "https://www.chipdip.ru/product/lb250lvf-wayon-8030578313"
J1 J2 J4 J8 J9: Package=None, Availability=Unavailable, MP=430450800, Price=None
J3: "Wire To Board / Wire To Wire Connector RoHS", Arrow Part Number=BM06B-SRSS-TB(LF)(SN), Manufacturer_Name="JST (JAPAN SOLDERLESS TERMINALS)", Mouser Part Number=N/A, Arrow Price/Stock=https://www.arrow.com/en/products/bm06b-srss-tb-lf-sn/jst-manufacturing?region=europe, Datasheet Link=http://www.jst-mfg.com/product/pdf/eng/eSR.pdf, Geometry.Height=4.25mm, Manufacturer_Part_Number=BM06B-SRSS-TB(LF)(SN), Mouser Price/Stock=https://www.mouser.co.uk/ProductDetail/JST-Commercial/BM06B-SRSS-TBLFSN?qs=IKkN%2F947nfAcbKIXx%2F1kIg%3D%3D
J5: "JST SH, 4 Way, 1 Row, Straight PCB Header", Arrow Part Number=BM04B-SRSS-TB(LFSN), Manufacturer_Name="JST (JAPAN SOLDERLESS TERMINALS)", Arrow Price/Stock=https://www.arrow.com/en/products/bm04b-srss-tb-lf-sn/jst-manufacturing?region=europe, Datasheet Link=http://uk.rs-online.com/web/p/products/5151541P, Geometry.Height=4.25mm, Manufacturer_Part_Number=BM04B-SRSS-TB(LFSN)
J7: "30A Low Temperature Rise Fire Retardant Plug", Manufacturer_Name=Amass, Datasheet Link=https://www.tme.eu/sl/Document/ce4077e36b79046da520ca73227e15de/XT30PW%20SPEC.pdf, Geometry.Height=5mm, Manufacturer_Part_Number=XT30PW-M
L1: library part B82472G6332M000, "SMD / SMT Inductors (Coils), L=3.3uH, 7.3mm x 7.3mm", Manufacturer_Name=TDK, Mouser Part Number=871-B82472G6332M000, Datasheet Link=https://product.tdk.com/system/files/dam/doc/product/inductor/inductor/smd/data_sheet/30/db/ind_2008/b82472g6.pdf, Geometry.Height=4.5mm, Manufacturer_Part_Number=B82472G6332M000, Mouser Price/Stock=https://www.mouser.co.uk/ProductDetail/EPCOS-TDK/B82472G6332M000?qs=x3Z3TaiycdvLmjm0xB%2FIcA%3D%3D
Q1 Q2 Q3 Q4 Q5 Q6: "Infineon IRF8736PBF N-channel MOSFET, 18 A, 30 V HEXFET, 8-Pin SOIC", Manufacturer_Name=Infineon, Mouser Part Number=942-IRF8736PBF, Arrow Part Number=IRF8736PBF, Arrow Price/Stock=https://www.arrow.com/en/products/irf8736pbf/infineon-technologies-ag, Datasheet Link=https://www.infineon.com/dgdl/irf8736pbf.pdf?fileId=5546d462533600a40153560d9e661d7f, Geometry.Height=1.75mm, Manufacturer_Part_Number=IRF8736PBF, Mouser Price/Stock=https://www.mouser.co.uk/ProductDetail/Infineon-IR/IRF8736PBF?qs=Z8%252BeY1k3TII91Qkl2E%252BuQw%3D%3D
R1 R2 R3 R4 R5 R6 R7 R8 R9 R10 R11 R12 R13: library part R0603, "Resistor 0603 Case 150 +/-0.1% 0.063W +/-25ppm/C", Manufacturer_Name="TE Connectivity", Manufacturer_Part_Number=CPF0603B150RE, Datasheet Link=http://www.farnell.com/datasheets/1786775.pdf, Geometry.Height=0.55mm
R14: Manufacturer=Yageo, Package=0805, Power=0.125W, Temperature=-55...+125°C, Tolerance=±5%, TypeResistor="Resistor film", ValueManufacturerPartNumber="Resistor film, 100, ±5%, 0805, 0.125W, -55...+125°C", HelpURL=https://www.digikey.com/product-detail/en/yageo/RC0805JR-07100RL/311-100ARCT-ND/731185
U1: "Buck Switching Regulator IC Positive Fixed 5V 1 Output 1A TO-263-6, D2PAK (5 Leads + Tab), TO-263BA", Package="TO-263-5 Microchip", Check_prices=https://www.snapeda.com/parts/LM2575-5.0WU/Microchip/view-part/?ref=eda, MF=Microchip, MP=LM2575-5.0WU, SnapEDA_Link=https://www.snapeda.com/parts/LM2575-5.0WU/Microchip/view-part/?ref=snap
VAR1: library part "Vristor 20K391"
VD1: library part Zener_single, Current=500mW, Manufacturer="Diodes Incorporated", Package=SOD-123, PartNumber=MMSZ5231B-7-F, Temperature=-55...+150°C, Voltage=5.1V, VoltageDrop=0.9V, HelpURL=https://www.digikey.com/product-detail/en/diodes-incorporated/MMSZ5231B-7-F/MMSZ5231B-FDICT-ND/755506, RecoveryTime=17Ohm, TypeDiode="Zener diode", ValueManufacturerPartNumber="Zener diode, 5.1V, 500mW, 0.9V, 17Ohm, SOD-123, -55...+150°C"
VT1: library part IRFZ44N, CurrentDS=2.6A, InputCapacitor=220pF, Manufacturer="Infineon Technologies", MaxPower=2.5W, Package=SOT-23, Temperature=-55...+150°C, VoltageDS=20V, GateCharge=2.9nC, HelpURL=https://www.digikey.com/product-detail/en/infineon-technologies/IRLML2246TRPBF/IRLML2246TRPBFCT-ND/2639576, PartNumber=IRFZ44N, RDS=135mOhm, TypeTransistor="MOSFET P-channel transistor", ValueManufacturerPartNumber="MOSFET P-channel transistor, 20V, 2.6A, 2.9nC, 2.5W, 135mOhm, 220pF, SOT-23, -55...+150°C"
X1: "1437566-3 - PUSHBUTTON SWITCH, SPST, 0.05A, 24V", Manufacturer_Name="TE Connectivity", Mouser Part Number=N/A, Arrow Part Number=1437566-3, Arrow Price/Stock=https://www.arrow.com/en/products/1437566-3/te-connectivity?region=europe, Datasheet Link=https://www.te.com/commerce/DocumentDelivery/DDEController?Action=showdoc&DocId=Customer+Drawing%7F1437566-3%7FC2%7Fpdf%7FEnglish%7FENG_CD_1437566-3_C2_1437566_3_1_c.dwg.pdf%7F1437566-3, Geometry.Height=4.57mm, Manufacturer_Part_Number=1437566-3, Mouser Price/Stock=https://www.mouser.co.uk/ProductDetail/TE-Connectivity-Alcoswitch/1437566-3?qs=xoXDFGdkQ2nqx7TKB39mxQ%3D%3D
ZQ1: library part NX5032GA-8.000M, "Crystals CRYSTAL 8MHZ 8PF SMD", Manufacturer_Name=NDK, Mouser Part Number=344-NX5032GA12MLNCD1, Datasheet Link=https://componentsearchengine.com/Datasheets/1/NX5032GA-12.000M-LN-CD-1.pdf, Geometry.Height=1.5mm, Manufacturer_Part_Number=NX5032GA-12.000M-LN-CD-1, Mouser Price/Stock=https://www.mouser.co.uk/ProductDetail/NDK/NX5032GA-12.000M-LN-CD-1?qs=55YtniHzbhA6vGHH627DAQ%3D%3D

## Free pads (board coordinates)
  round 1.524 hole 3.302: 13(61.5,45.8) 13(61.5,104) 13(157.9,45.8) 13(157.9,104)

## Via types
v1: diameter 0.6, hole 0.3, Top Layer to Bottom Layer, 66 vias
v2: diameter 0.7, hole 0.3, Top Layer to Bottom Layer, 11 vias
v3: diameter 0.602, hole 0.3, Top Layer to Bottom Layer, 4 vias
v4: diameter 0.8, hole 0.4, Top Layer to Bottom Layer, 4 vias

## Nets (pads, with @x,y where several pads share a name; then routed paths per layer and width w, separated by ;. In a path a pad name is that pad's centre, name@x,y a point inside that pad or via, vN(x,y) a via of type N, cw(c..) or ccw(c..) an arc to the next point about the centre after c; other vN are vias at no path point)
+3.3V: C6.2 C8.2 C9.2 C10.2 C11.1 C12.2 C16.2 D1.1 D1.28 D1.29 D1.64 D2.4 J1.5 J3.1 J4.5 J5.1 J6.1 J8.5 J9.5 | length 221.6
  Top Layer w0.25: J6.1 90.195,102.464 97.612,102.464 99.187,104.038 106.6,104.038 J3.1 ; C10.2 102.932,71.755 103.883,70.804 108.28,70.804 ; D1.1 107.95,82.617 108.772,83.439 ; D2.4 114.189,66.578 114.478,66.867 C16.2 116.93,66.867 118.643,68.58 118.643,73.177 117.651,74.17 117.651,74.376 ; D1.29 D1.28 114.272,72.012 114.402,71.882 C11.1 ; C9.2 115.926,70.931 115.799,70.804 C11.1 ; v1(120.85,87.706) 120.85,75.257 119.38,73.787 118.24,73.787 117.651,74.376 ; J4.5 123.604,88.714 v1(124.054,88.265) ; J9.5 151.587,71.057 151.587,87.143 J8.5 ; J3.1 106.6,88.331 108.128,86.803 C6.2 108.966,85.792 108.772,85.598 D1.64 108.772,83.439 ; J3.1 109.144,102.812 109.207,102.875 J5.1 111.8,104.115 115.57,104.115 116.764,102.921 116.764,80.127 116.397,79.76 116.397,75.629 116.931,75.096 117.651,74.376 ; 108.28,70.804 108.28,73.988 108.75,74.458 108.75,74.791 109.277,75.318 109.277,79.743 108.772,80.248 108.772,83.439 ; 108.28,70.804 C12.2 C8.2 C11.1
  Bottom Layer w0.25: v1(120.85,87.706) 133.829,87.706 134.388,88.265 ; v1(124.054,88.265) 134.388,88.265 ; J8.5 147.366,91.364 144.196,91.364 142.85,92.71 142.85,95.473 J1.5 141.475,95.353 134.388,88.265
+5V: C14.1 C15.2 D2.1 D2.3 D5.4 J1.1 J2.7 J4.1 J8.1 J9.1 L1.2 U1.4 | length 251.7
  Top Layer w0.25: D5.4 88.468,75.692 v1(89.205,76.429) ; C15.2@110.568,62.597 110.693,62.536 110.909,62.357 ; C15.2@110.644,62.597 112.572,62.597 112.812,62.357 112.45,62.357 ; 110.937,63.236 111.11,63.063 ; D2.3 112.837,62.357 116.027,62.357 122.487,68.816 122.487,97.982 122.504,98 ; v1(119.659,94.996) 122.504,92.151 122.504,68.834 122.758,69.088 122.758,91.922 122.504,92.176 122.504,98 ; J4.1 122.504,98 ; J9.1 152.375,71.055 152.375,87.145 J8.1
  Top Layer w0.5: C15.2 110.428,62.457 C15.2@110.568,62.597 ; C15.2@110.644,62.597 110.937,62.89 110.937,63.236 D2.1 ; 110.909,62.357 112.45,62.357 112.821,62.728 112.821,63.962 D2.3
  Top Layer w1: U1.4 109,49.9 109.586,50.486 109.586,52.286 L1.2 110.6,53.3 110.6,55.35 110.75,55.5 C14.1 110.95,58.65 110.428,59.172 C15.2
  Bottom Layer w0.25: J2.7 76.77,94.93 86.122,94.93 ; v1(89.205,76.429) 89.205,91.846 86.122,94.93 ; v1(119.659,94.996) 119.593,94.93 86.122,94.93 ; J4.1 124.707,100.203 141.12,100.203 J1.1 143.713,97.609 143.713,93.497 145.034,92.177 149.553,92.177 J8.1
+12V: B1.1 B3.1 B5.1 C13.1 C18.1 C19.1 C20.1 D3.2 D4.2 D6.2 Q2.5 Q2.6 Q2.7 Q2.8 Q4.5 Q4.6 Q4.7 Q4.8 Q5.5 Q5.6 Q5.7 Q5.8 R2.2 U1.1 VAR1.2 VD1.2 VT1.2 | length 254.8
  Top Layer w0.25: C18.1@83.9,51.875 83.998,51.875 83.998,52.832 C18.1@84,52.832 ; C18.1 C18.1@84,52.832 ; C18.1@84.2,53.7 84.2,53.95 ; 84.2,54.021 84.2,53.95 ; U1.1@102.997,44.8 U1.1 ; U1.1@104.115,44.585 102.557,44.585 98.1,49.042 98.095,49.047 98.095,52.375 96.52,53.95 84.2,53.95 ; 128.3,46 133.698,51.398 133.786,51.486 134.354,51.486 134.442,51.398 C13.1@135.469,50.37 ; C18.1@84,52.832 84,53.7 84,53.95 84.2,53.95
  Top Layer w0.5: D6.2 78.232,59.485 78.83,58.888 79.783,58.888 B5.1@79.883,58.787 ; R2.2 80.503,87.503 78.9,85.9 78.9,83.2 79.1,83 79.1,79.647 78.359,78.907 D3.2 78.359,78.281 78.957,77.684 79.91,77.684 80.01,77.583 B1.1 80.11,77.071 80.11,76.293 80.444,75.958 84.241,75.958 85.3,74.9 85.3,71.6 83.9,70.2 78.923,70.2 78.232,69.509 D4.2 78.232,68.883 78.83,68.286 79.783,68.286 79.883,68.185 B3.1 79.983,67.673 79.983,66.817 80.426,66.374 84.126,66.374 85.3,65.2 85.3,62.5 82.9,60.1 80.3,60.1 79.883,59.683 B5.1@79.883,58.787 ; C18.1@84.2,53.7 84,53.7 81.9,53.7 79.883,55.717 B5.1 B5.1@79.883,58.787
  Top Layer w0.8: 61.695,80.409 61.695,80.722 61.746,80.772 Q2.8 ; 61.822,70.467 61.822,70.154 61.873,70.104 Q4.5 ; Q4.8@61.873,66.294 Q4.8 ; Q5.5@62.127,56.388 Q5.5 ; C13.1@135.469,50.37 136.019,50.92 136.019,51.598 C13.1 ; VT1.2@136.019,60.469 VT1.2 VT1.2@138.25,62.7 ; VD1.2 VT1.2@138.25,62.7 ; VAR1.2 138.45,62.9 VT1.2@138.25,62.7 ; C20.1@144.891,52.045 C20.1
  Top Layer w1.5: 61.695,80.409 59.6,78.314 59.6,72.689 61.822,70.467 ; Q4.8@61.873,66.294 59.7,64.121 59.7,58.815 Q5.5@62.127,56.388 ; Q2.8 Q2.7 Q2.6 Q2.5 ; Q4.8 Q4.7 Q4.6 Q4.5 ; Q5.5 Q5.6 Q5.7 Q5.8 62.439,50.261 64.3,48.4 68.6,48.4 72.075,51.875 C19.1 C18.1@83.9,51.875 ; 84.2,54.021 85.079,54.9 96.2,54.9 98.1,53 98.1,46.2 99.5,44.8 U1.1@102.997,44.8 ; U1.1@104.115,44.585 105.1,43.6 114.4,43.6 116.8,46 128.3,46 ; 133.698,51.398 134.442,51.398 135.819,51.398 C13.1@136.019,51.598 ; VT1.2@136.019,60.469 C13.1 C20.1@144.891,52.045
+12V_IN: F1.1 J7.1 | length 5.1
  Top Layer w1: F1.1 F1.1@125.45,58.7 ; J7.1@125.45,53.762 J7.1
  Top Layer w1.5: J7.1@125.45,53.762 F1.1@125.45,58.7
AB: B1.3 D5.8 | length 15.7
  Top Layer w0.25: B1.3 82.55,78.283 83.185,78.918 84.125,78.918 84.938,78.105 v1(84.938,76.616) ; D5.8 88.519,70.612 v1(88.519,69.596)
  Bottom Layer w0.25: v1(84.938,76.616) 88.519,73.035 v1(88.519,69.596)
AT: B1.2 D5.7 | length 22.1
  Top Layer w0.25: B1.2 v1(81.28,79.248) ; D5.7 89.084,71.882 89.084,75.024 89.854,75.793 89.854,80.352 v1(88.494,81.712)
  Bottom Layer w0.25: v1(81.28,79.248) 86.03,79.248 v1(88.494,81.712)
BB: B3.3 D5.10 | length 16.6
  Top Layer w0.25: B3.3 v1(82.423,69.063) ; v1(92.278,68.555) 92.278,71.882 D5.10
  Bottom Layer w0.25: v1(82.423,69.063) 82.448,69.088 87.63,69.088 88.062,68.656 88.062,68.263 88.405,67.92 91.643,67.92 v1(92.278,68.555)
BT: B3.2 D5.9 | length 24.5
  Top Layer w0.25: B3.2 81.153,68.707 v1(81.382,68.936) ; v1(92.431,62.128) 92.431,67.513 92.913,67.996 92.913,70.612 D5.9
  Bottom Layer w0.25: v1(81.382,68.936) 81.382,68.504 82.55,67.335 85.979,67.335 87.351,65.964 88.595,65.964 v1(92.431,62.128)
BTN_END: D1.35 J3.3 | length 42.4
  Top Layer w0.25: v1(104.6,94.285) J3.3 ; D1.35 119.919,76.117 120.4,76.598 120.4,84.455 119.659,85.196 v1(119.659,91.694)
  Bottom Layer w0.25: v1(104.6,94.285) 117.069,94.285 v1(119.659,91.694)
BTN_START: J3.4
CB: B5.3 D5.12 | length 28.2
  Top Layer w0.25: B5.3 82.423,57.442 82.867,56.998 89.256,56.998 90.679,58.421 90.679,73.661 91.44,74.422 D5.12
CT: B5.2 D5.11 | length 29.1
  Top Layer w0.25: B5.2 81.153,57.277 82.017,56.413 90.17,56.413 91.643,57.887 91.643,72.314 92.481,73.152 D5.11
Direct_1: D1.18 J1.4 | length 66.4
  Top Layer w0.25: D1.18 109.272,74.32 110.668,75.716 v1(110.668,78.054)
  Bottom Layer w0.25: v1(110.668,78.054) 119.399,86.785 154.057,86.785 154.584,87.312 154.584,95.738 J1.4
Direct_2: B4.3 D1.58 | length 36.2
  Top Layer w0.25: B4.3 97.79,60.985 98.577,61.773 98.577,64.211 97.841,64.948 v1(97.841,73.558) ; v1(111.772,83.363) D1.58
  Bottom Layer w0.25: v1(97.841,73.558) 107.645,83.363 v1(111.772,83.363)
Direct_3: D1.19 J4.4 | length 49.1
  Top Layer w0.25: v1(109.772,71.526) D1.19
  Bottom Layer w0.25: v1(109.772,71.526) 106.426,71.526 103.979,73.973 103.979,75.76 105.238,77.018 108.311,77.018 113.03,81.737 113.64,81.737 126.263,94.361 127,94.361 128.499,95.86 128.499,96.926 128.905,97.333 130.837,97.333 J4.4
Direct_4: D1.20 J8.4 | length 46.4
  Top Layer w0.25: D1.20 110.272,74.219 110.592,74.219 v1(110.744,74.371)
  Bottom Layer w0.25: v1(110.744,74.371) 111.773,75.4 149.63,75.4 J8.4
Direct_5: D1.21 J9.4 | length 51.3
  Top Layer w0.25: D1.21 110.772,72.235 v1(111.125,71.882)
  Bottom Layer w0.25: v1(111.125,71.882) 139.318,71.882 147.185,64.015 147.259,63.941 147.259,63.838 147.259,63.783 147.259,61.374 149.433,59.2 ; 149.369,59.208 ccw(c149.433,59.45) 149.431,59.2 149.433,59.2 ; J9.4 151.73,59.2 149.433,59.2
Enable_2: B4.1 D1.56 | length 49
  Top Layer w0.25: B4.1 99.06,58.445 99.873,59.258 99.873,63.5 105.004,68.631 117.792,68.631 118.186,69.025 118.186,72.923 117.201,73.909 117.201,74.189 116.745,74.645 116.464,74.645 112.772,78.338 D1.56
ENC_1_SIG: D1.8 J1.3 | length 56.2
  Top Layer w0.25: D1.8 108.073,79.117 v1(108.204,79.248)
  Bottom Layer w0.25: v1(108.204,79.248) 111.642,82.686 112.395,82.686 120.294,90.585 120.294,99.314 121.768,100.787 146.535,100.787 J1.3
ENC_2_SIG: D1.9 J3.2 | length 48.4
  Top Layer w0.25: J3.2 105.6,93.978 97.924,86.302 97.924,74.771 99.326,73.368 107.025,73.368 108.3,74.644 108.3,74.977 108.651,75.328 108.651,78.034 108.068,78.617 D1.9
ENC_3_SIG: D1.10 J4.3 | length 35
  Top Layer w0.25: D1.10 107.684,78.117 v1(108.026,77.775)
  Bottom Layer w0.25: v1(108.026,77.775) 112.46,82.209 113.03,82.209 122.504,91.683 122.504,97.18 123.317,97.993 128.498,97.993 J4.3
ENC_4_SIG: D1.11 J8.3 | length 55.7
  Top Layer w0.25: v1(105.054,74.905) 105.054,77.261 105.41,77.617 D1.11
  Bottom Layer w0.25: v1(105.054,74.905) 106.212,76.062 138.267,76.062 143.358,81.153 152.383,81.153 J8.3
ENC_5_SIG: D1.12 J9.3 | length 55.5
  Top Layer w0.25: v1(106.488,74.447) 106.393,74.447 106.199,74.642 105.912,74.642 105.721,74.832 105.721,76.902 105.912,77.092 106.759,77.092 D1.12
  Bottom Layer w0.25: v1(106.488,74.447) 106.858,74.077 109.916,74.077 111.194,72.8 139.823,72.8 147.549,65.075 152.355,65.075 J9.3
GND: B1.4 B2.5 B3.4 B5.4 C1.2 C5.2 C6.1 C7.2 C8.1 C9.1 C10.1 C11.2 C12.1 C13.2 C14.2 C15.1 C16.1 C17.1 C18.2 C19.2 C20.2 D1.15 D1.27 D1.31 D1.47 D1.63 D2.2 D5.3 D13.2 J1.8 J2.8 J3.6 J3.7 J3.8 J4.8 J5.MP2 J6.4 J7.2 J7.3 J7.4 J8.8 J9.8 Q1.1 Q1.2 Q1.3 Q3.1 Q3.2 Q3.3 Q6.1 Q6.2 Q6.3 R4.1 R7.1 R8.1 R11.1 R13.1 R14.1 U1.3 U1.5 U1.6 VAR1.1 X1.1 | length 287
  Top Layer w0.25: B3.4 83.693,68.174 v1(85.242,69.723) ; U1.6 v1(95.638,50.013) ; v1(100.368,50.013) 102.181,48.2 U1.3 ; v1(101.981,75.768) v1@102.032,75.819 ; C7.2 v1@102.032,75.819 ; C1.2 103.505,78.802 102.819,78.116 102.819,76.606 v1@102.032,75.819 ; C5.2 104.775,83.315 105.308,82.782 v1(105.308,82.271) ; C6.1 109.815,88.203 v1(110.693,87.325) ; v1(115.545,74.676) 115.724,74.676 116.207,74.194
  Top Layer w0.254: 104.49,74.11 105.89,74.11 106.18,73.82 106.837,73.82 107.848,74.832 107.848,75.402 107.657,75.594 106.807,75.594 D1.15 ; 116.207,74.194 116.557,74.194 116.749,74.002 116.749,73.721 117,73.47 117,73.3
  Bottom Layer w0.25: v1(85.242,69.723) 84.887,70.079 84.887,75.108 84.303,75.692 84.303,77.14 85.09,77.927 86.995,77.927 87.96,76.962 87.96,76.252 97.206,67.007 ; v1(95.638,50.013) v1(100.368,50.013) ; 97.206,73.838 v1(110.693,87.325) ; 103.429,56.972 101.981,58.42 101.981,62.231 ; v1(105.308,82.271) 97.206,74.168 97.206,72.923 ; v2(114.6,74.7) 148.718,74.7 152.375,71.044 152.375,69.85 ; v1(115.545,74.676) 143.586,74.676 147.218,71.044 151.181,71.044 152.375,69.85 ; v2(115.8,69.5) 115.8,58.675 114.097,56.972 ; 97.206,67.007 101.981,62.231 ; 97.206,67.007 97.206,72.923 ; 97.206,72.923 99.136,72.923 v1(101.981,75.768) 101.981,62.231 ; 101.981,62.231 107.24,56.972 114.097,56.972 ; 114.097,56.972 152.349,56.972 154.584,59.207 154.584,64.453 153.987,65.049 153.187,65.049 152.375,65.862 152.375,69.85
  other v2: 105.1,71.5 101.3,74.1 130.2,74.3 103,74.325 125.7,74.4 83.7,77.6 115.7,101 117.5,103.9 113.7,105.3
Ha: D5.13 J2.4 | length 43.4
  Top Layer w0.3: v3(89.2,98) 95.314,98 98.759,94.555 98.759,87.809 97.2,86.25 97.2,79.09 93.803,75.692 D5.13
  Bottom Layer w0.3: J2.4 79.7,98 v3(89.2,98)
Hb: D5.14 J2.5 | length 50.7
  Top Layer w0.3: v3(89.827,97.337) 89.909,97.337 90.072,97.5 95.107,97.5 98.259,94.348 98.259,88.12 98.226,88.087 98.226,87.983 96.7,86.457 96.7,79.859 93.803,76.962 D5.14
  Bottom Layer w0.3: J2.5 71.49,97.99 78.987,97.99 79.64,97.337 v3(89.827,97.337)
Hc: D5.15 J2.6 | length 45.1
  Top Layer w0.3: v3(89.1,96.686) 90.097,96.686 90.407,96.996 90.407,97 94.9,97 97.759,94.141 97.759,88.441 97.726,88.407 97.726,88.19 96.2,86.664 96.2,80.63 93.803,78.232 D5.15
  Bottom Layer w0.3: J2.6 72.9,96.1 74.01,97.21 79.06,97.21 79.584,96.686 v3(89.1,96.686)
M1_PWM: D1.40 J1.2 | length 64.6
  Top Layer w0.25: D1.40 119.384,78.617 v1(119.507,78.74)
  Bottom Layer w0.25: v1(119.507,78.74) 125.247,84.48 146.608,84.48 148.463,86.335 154.712,86.335 155.042,86.665 155.042,98.831 153.67,100.203 150.495,100.203 150.114,99.822 150.114,98.882 149.225,97.993 146.329,97.993 J1.2
M2_PWM: B2.2 D1.46 | length 79.8
  Top Layer w0.25: B2.2 87.427,93.04 87.427,105.232 88.824,106.629 116.84,106.629 118.567,104.902 118.567,84.144 119.5,83.211 119.5,81.763 119.354,81.617 D1.46
M3_PWM: D1.38 J4.2 | length 25.6
  Top Layer w0.25: D1.38 119.306,77.617 v1(119.507,77.818) ; v1(125.501,83.813) 125.501,97.997 J4.2
  Bottom Layer w0.25: v1(119.507,77.818) v1(125.501,83.813)
M4_PWM: D1.36 J8.2 | length 38.8
  Top Layer w0.25: D1.36 119.329,76.617 v1(119.522,76.81)
  Bottom Layer w0.25: v1(119.522,76.81) 138.11,76.81 144.637,83.337 151.567,83.337 J8.2
M5_PWM: D1.44 J9.2 | length 76.4
  Top Layer w0.25: D1.44 119.238,80.617 119.95,81.329 119.95,83.469 119.024,84.395 119.024,97.434 122.403,100.813 127,100.813 127.711,100.101 127.711,86.445 145.313,68.843 151.587,68.843 J9.2
NetB1_5: B1.5 D8.1 R3.1 | length 83
  Top Layer w0.25: D8.1 75.401,82.454 R3.1 75.401,84.57 82.677,91.846 85.649,91.846 85.75,91.745 85.75,85.573 86.589,84.734 89.306,84.734 90.754,83.287 90.754,74.893 90.087,74.226 90.087,58.845 88.976,57.734 86.563,57.734 85.877,58.42 85.877,75.55 85.615,75.812 85.615,79.208 83.82,81.003 B1.5
NetB1_6: B1.6 C2.1 J2.1 Q1.5 Q1.6 Q1.7 Q1.8 Q2.1 Q2.2 Q2.3 | length 51.8
  Top Layer w0.25: Q2.3 68.25,83.312 v1(68.25,79.426) ; v1(80.493,80.061) 81.382,80.061 81.966,80.645 81.966,83.693 ; C2.1 81.497,84.161 81.966,83.693 ; B1.6 82.55,83.109 81.966,83.693
  Top Layer w1.143: Q2.1 Q2.2 Q2.3 66.245,83.312 65.576,83.982 65.576,85.224 62.916,87.884 Q1.8 Q1.7 Q1.6 Q1.5 61.931,94.831 66.2,99.1 J2.1
  Bottom Layer w0.25: v1(68.25,79.426) 68.58,79.096 79.527,79.096 v1(80.493,80.061)
NetB1_7: B1.7 D7.1 R1.1 | length 10.3
  Top Layer w0.25: R1.1 75.401,79.07 75.787,79.457 D7.1 v1(76.886,80.188) ; v1(81.28,80.924) B1.7
  Bottom Layer w0.25: v1(76.886,80.188) 78.613,81.915 80.289,81.915 v1(81.28,80.924)
NetB1_8: B1.8 C2.2 D3.1 | length 7.2
  Top Layer w0.25: v1(77.927,79.985) 78.016,79.985 78.359,80.328 D3.1 ; v1(80.01,81.28) B1.8 80.01,83.591 80.097,83.679 C2.2
  Bottom Layer w0.25: v1(77.927,79.985) 79.223,81.28 v1(80.01,81.28)
NetB2_3: B2.3 R4.2 | length 2.4
  Top Layer w0.25: B2.3 95.262,88.785 R4.2
NetB2_6: B2.6 D5.16 | length 11.6
  Top Layer w0.25: B2.6 92.989,82.398 92.989,79.502 D5.16
NetB2_8: B2.8 B4.14 B4.16 R2.1 R11.2 | length 37.3
  Top Layer w0.25: R11.2 84.836,88.531 84.824,88.519 R2.1 84.824,85.483 B2.8 88.646,83.185 90.304,81.527 90.304,75.343 89.534,74.574 89.534,61.823 88.697,60.985 ; B4.16 88.697,58.445 88.697,60.985 ; B4.14 88.697,60.985
NetB3_5: B3.5 D10.1 R6.1 | length 12.3
  Top Layer w0.25: R6.1 75.426,73.31 D10.1 77.445,72.898 v1(78.435,73.889) ; v1(83.693,71.933) B3.5
  Bottom Layer w0.25: v1(78.435,73.889) 80.391,71.933 v1(83.693,71.933)
NetB3_6: B3.6 C3.1 J2.2 Q3.5 Q3.6 Q3.7 Q3.8 Q4.1 Q4.2 Q4.3 | length 77.4
  Top Layer w0.25: Q3.7 64.389,74.803 v1(64.44,74.752) ; C3.1 81.305,74.295 82.105,74.295 82.423,73.977 ; B3.6 82.423,73.977 ; v1(82.423,74.752) 82.423,73.977
  Top Layer w1.143: Q4.1 Q4.2 Q4.3 65.07,68.834 64.4,69.504 64.4,71.287 62.185,73.503 Q3.8 Q3.7 Q3.6 Q3.5 62.185,77.373 64,79.189 64,84.9 62.6,86.3 61.1,86.3 60,87.4 60,95.8 65.1,100.9 70.8,100.9 J2.2
  Bottom Layer w0.25: v1(64.44,74.752) 66.592,72.6 74.3,72.6 76.452,74.752 v1(82.423,74.752)
NetB3_7: B3.7 D9.1 R5.1 | length 9.6
  Top Layer w0.25: R5.1 75.426,70.414 75.838,70.826 D9.1 77.013,71.12 77.648,71.755 77.648,72.415 78.892,72.415 79.578,71.73 80.493,71.73 81.153,72.39 B3.7
NetB3_8: B3.8 C3.2 D4.1 | length 24.6
  Top Layer w0.25: D4.1 78.232,70.587 76.175,68.529 73.304,68.529 72.619,69.215 72.619,74.867 73.343,75.59 79.223,75.59 79.883,74.93 B3.8 79.905,74.147 C3.2
NetB4_2: B4.2 R7.2 | length 2.3
  Top Layer w0.25: B4.2 95.123,59.715 95.148,59.69 R7.2
NetB4_4: B4.4 R8.2 | length 2.4
  Top Layer w0.25: B4.4 94.971,62.255 95.326,62.611 R8.2
NetB4_13: B4.13 D5.5 | length 20.7
  Top Layer w0.25: v1(86.69,76.886) 86.817,76.759 86.817,74.422 D5.5 ; B4.13 88.697,62.255 v1(88.697,68.555)
  Bottom Layer w0.25: v1(86.69,76.886) 89.154,74.422 89.154,69.012 v1(88.697,68.555)
NetB4_15: B4.15 D5.1 | length 22.2
  Top Layer w0.25: B4.15 86.677,59.715 86.36,60.033 86.36,76.229 86.065,76.524 86.065,78.572 86.995,79.502 D5.1
NetB5_5: B5.5 D12.1 R10.1 | length 12.7
  Top Layer w0.25: D12.1 76.124,62.357 v1(76.124,63.246) ; v1(83.21,65.075) 83.693,64.592 B5.5
  Top Layer w0.508: R10.1 75.565,62.261 75.661,62.357 D12.1
  Bottom Layer w0.25: v1(76.124,63.246) 76.886,64.008 82.55,64.008 83.21,64.668 v1(83.21,65.075)
NetB5_6: B5.6 C4.1 J2.3 Q5.1 Q5.2 Q5.3 Q6.5 Q6.6 Q6.7 Q6.8 | length 96.4
  Top Layer w0.25: Q6.5 62.376,63.119 Q6.5@62.376,63.34 ; C4.1 81.1,65.5 C4.1@81.19,65.5
  Top Layer w0.6: Q5.3 73.818,55.118 76.9,58.2 76.9,60.3 77.6,61 82,61 82.423,61.423 B5.6 82.373,63.849 82.373,64.451 81.614,65.21 81.19,65.21 C4.1@81.19,65.5
  Top Layer w1.143: Q6.5 Q6.6 Q6.7 62.185,59.315 64.7,56.8 64.7,55.788 65.37,55.118 Q5.3 Q5.2 Q5.1 ; Q6.5@62.376,63.34 63.976,64.94 69.041,64.94 70,65.9 70,91.5 70.7,92.2 78.1,92.2 81.1,95.2 81.1,99.8 80.215,100.685 76.885,100.685 75.672,99.472 75.672,99.172 J2.3
NetB5_7: B5.7 D11.1 R9.1 | length 10.1
  Top Layer w0.25: D11.1 76.124,64.135 v1(77.013,63.246) ; v1(81.153,61.824) B5.7
  Top Layer w0.508: R9.1 75.749,65.717 75.749,65.371 75.965,65.155 D11.1
  Bottom Layer w0.25: v1(77.013,63.246) 78.435,61.824 v1(81.153,61.824)
NetB5_8: B5.8 C4.2 D6.1 | length 4.8
  Top Layer w0.25: D6.1 78.232,62.535 79.553,62.535 79.883,62.865 B5.8 79.883,64.491 79.7,64.674 C4.2
NetC1_1: C1.1 D1.6 ZQ1.1 | length 7.4
  Top Layer w0.3: ZQ1.1 102.126,79.026 103.302,80.202 C1.1 104.352,80.117 D1.6
NetC5_1: C5.1 D1.5 ZQ1.2 | length 7.8
  Top Layer w0.3: ZQ1.2 103.056,83.026 104.167,81.915 C5.1 104.367,81.915 105.665,80.617 D1.5
NetC7_1: C7.1 D1.7 X1.2 | length 11.1
  Top Layer w0.25: X1.2 100.278,75 103.948,75 104.094,75.146 104.094,75.581 C7.1 104.332,77.337 105.082,78.087 105.082,79.289 105.41,79.617 D1.7
NetC17_2: C17.2 D2.5 | length 1.9
  Top Layer w0.25: C17.2 109.88,66.359 110.099,66.578 D2.5
NetD5_6: D5.6 R12.2 | length 24.6
  Top Layer w0.25: v1(87.363,68.441) 86.868,68.936 86.868,72.847 87.173,73.152 D5.6 ; v1(98.007,57.797) R12.2
  Bottom Layer w0.25: v1(87.363,68.441) 87.363,67.585 88.478,66.47 89.334,66.47 v1(98.007,57.797)
NetD7_2: D7.2 Q2.4 R1.2 | length 15.1
  Top Layer w0.25: v1(72.619,85.782) 72.2,85.363 72.2,80.7 72.672,80.228 73.423,80.228 D7.2 73.463,79.482 73.901,79.045 R1.2
  Top Layer w0.508: Q2.4 v4(67.482,85.782)
  Bottom Layer w0.25: v4(67.482,85.782) v1(72.619,85.782)
NetD8_2: D8.2 Q1.4 R3.2 | length 16.6